# Altium PCB wheelchair.PcbDoc
Units mil, origin at the board's own origin, x right, y up, seen from the top; angles counter-clockwise.
Board outline 4200 x 3685 mil, 2 copper layers (Top Layer, Bottom Layer); 47 components, 63 nets, 283 pads, 4 vias.
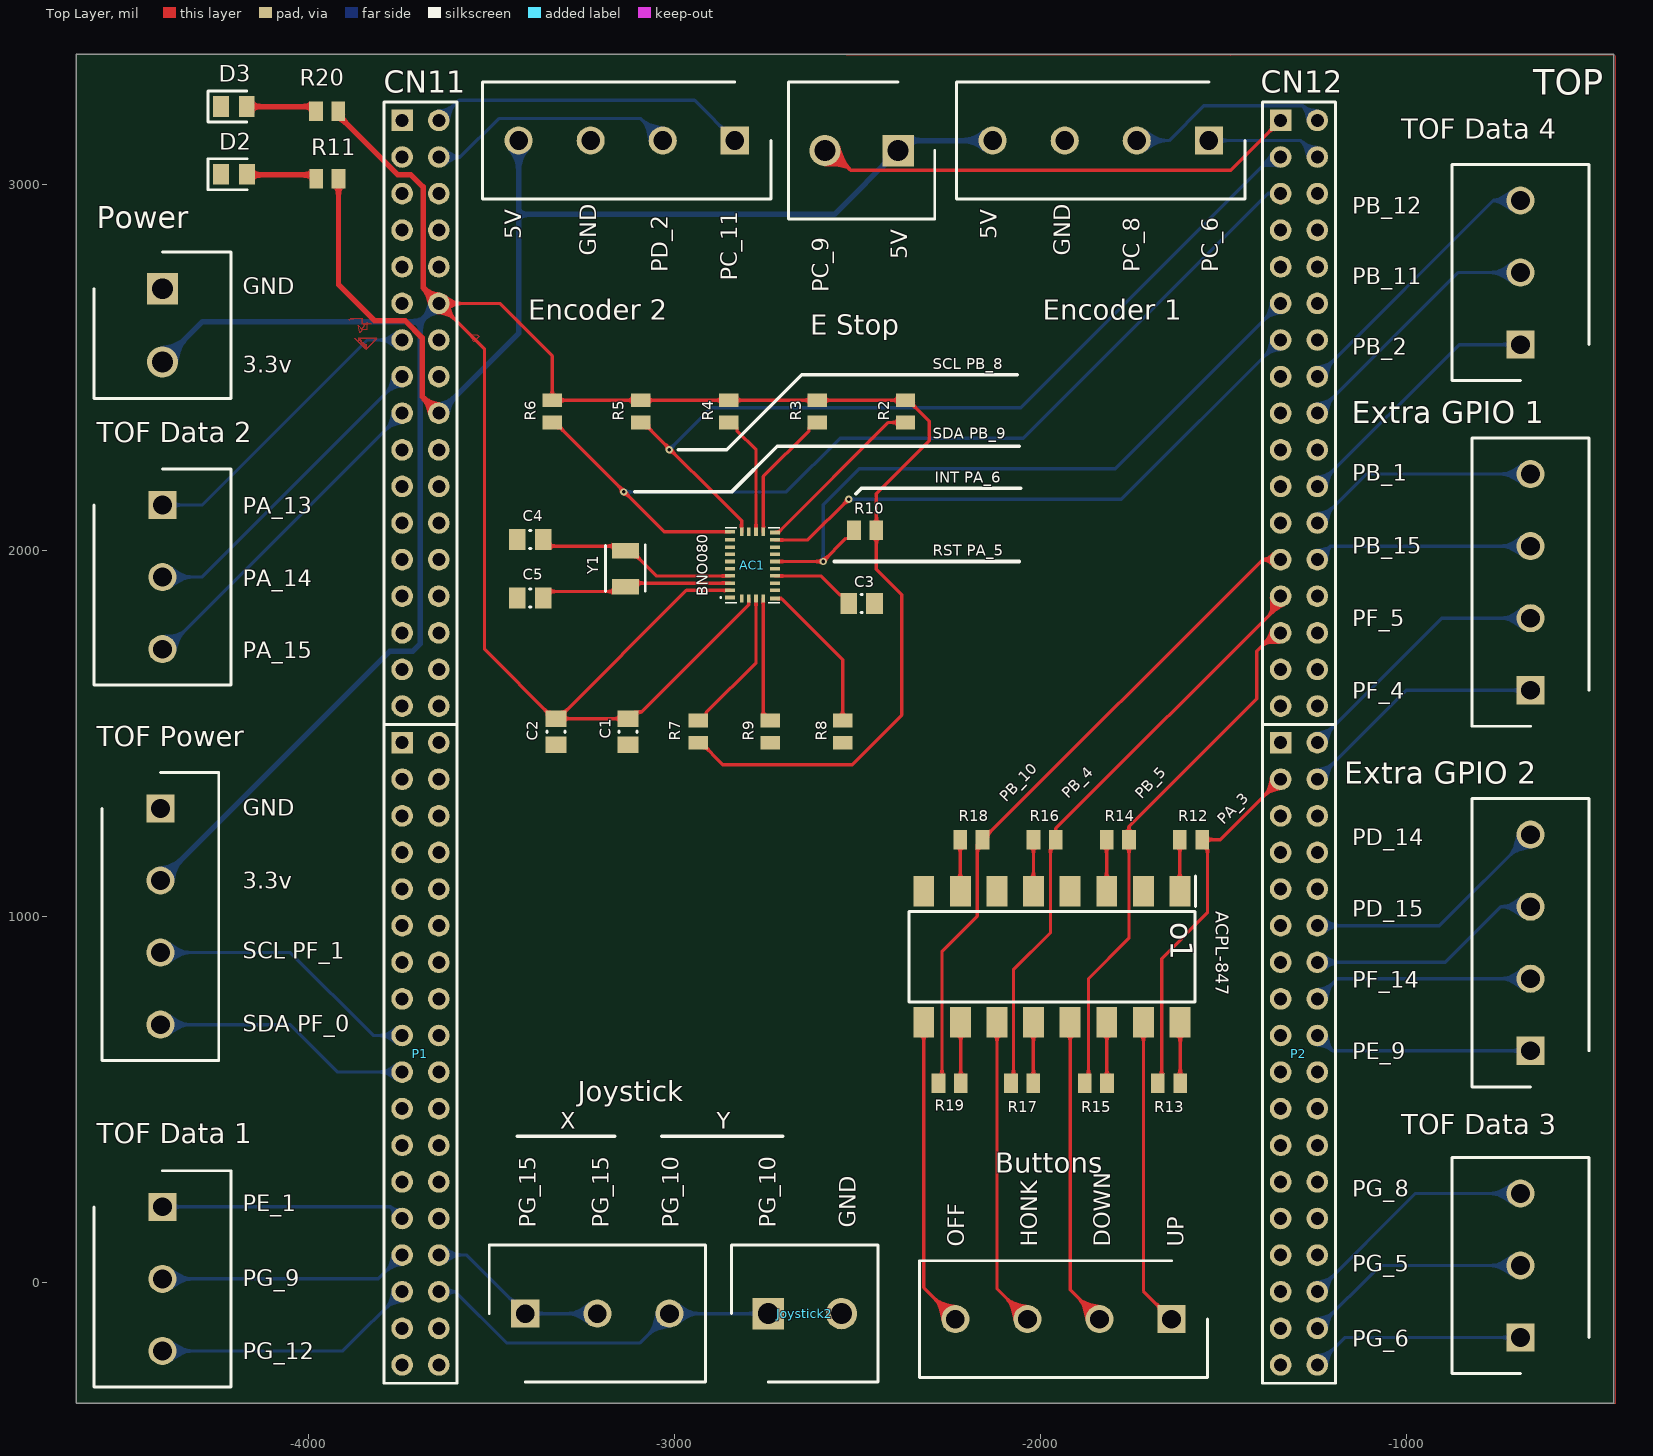
[diagram p0: Top Layer view]
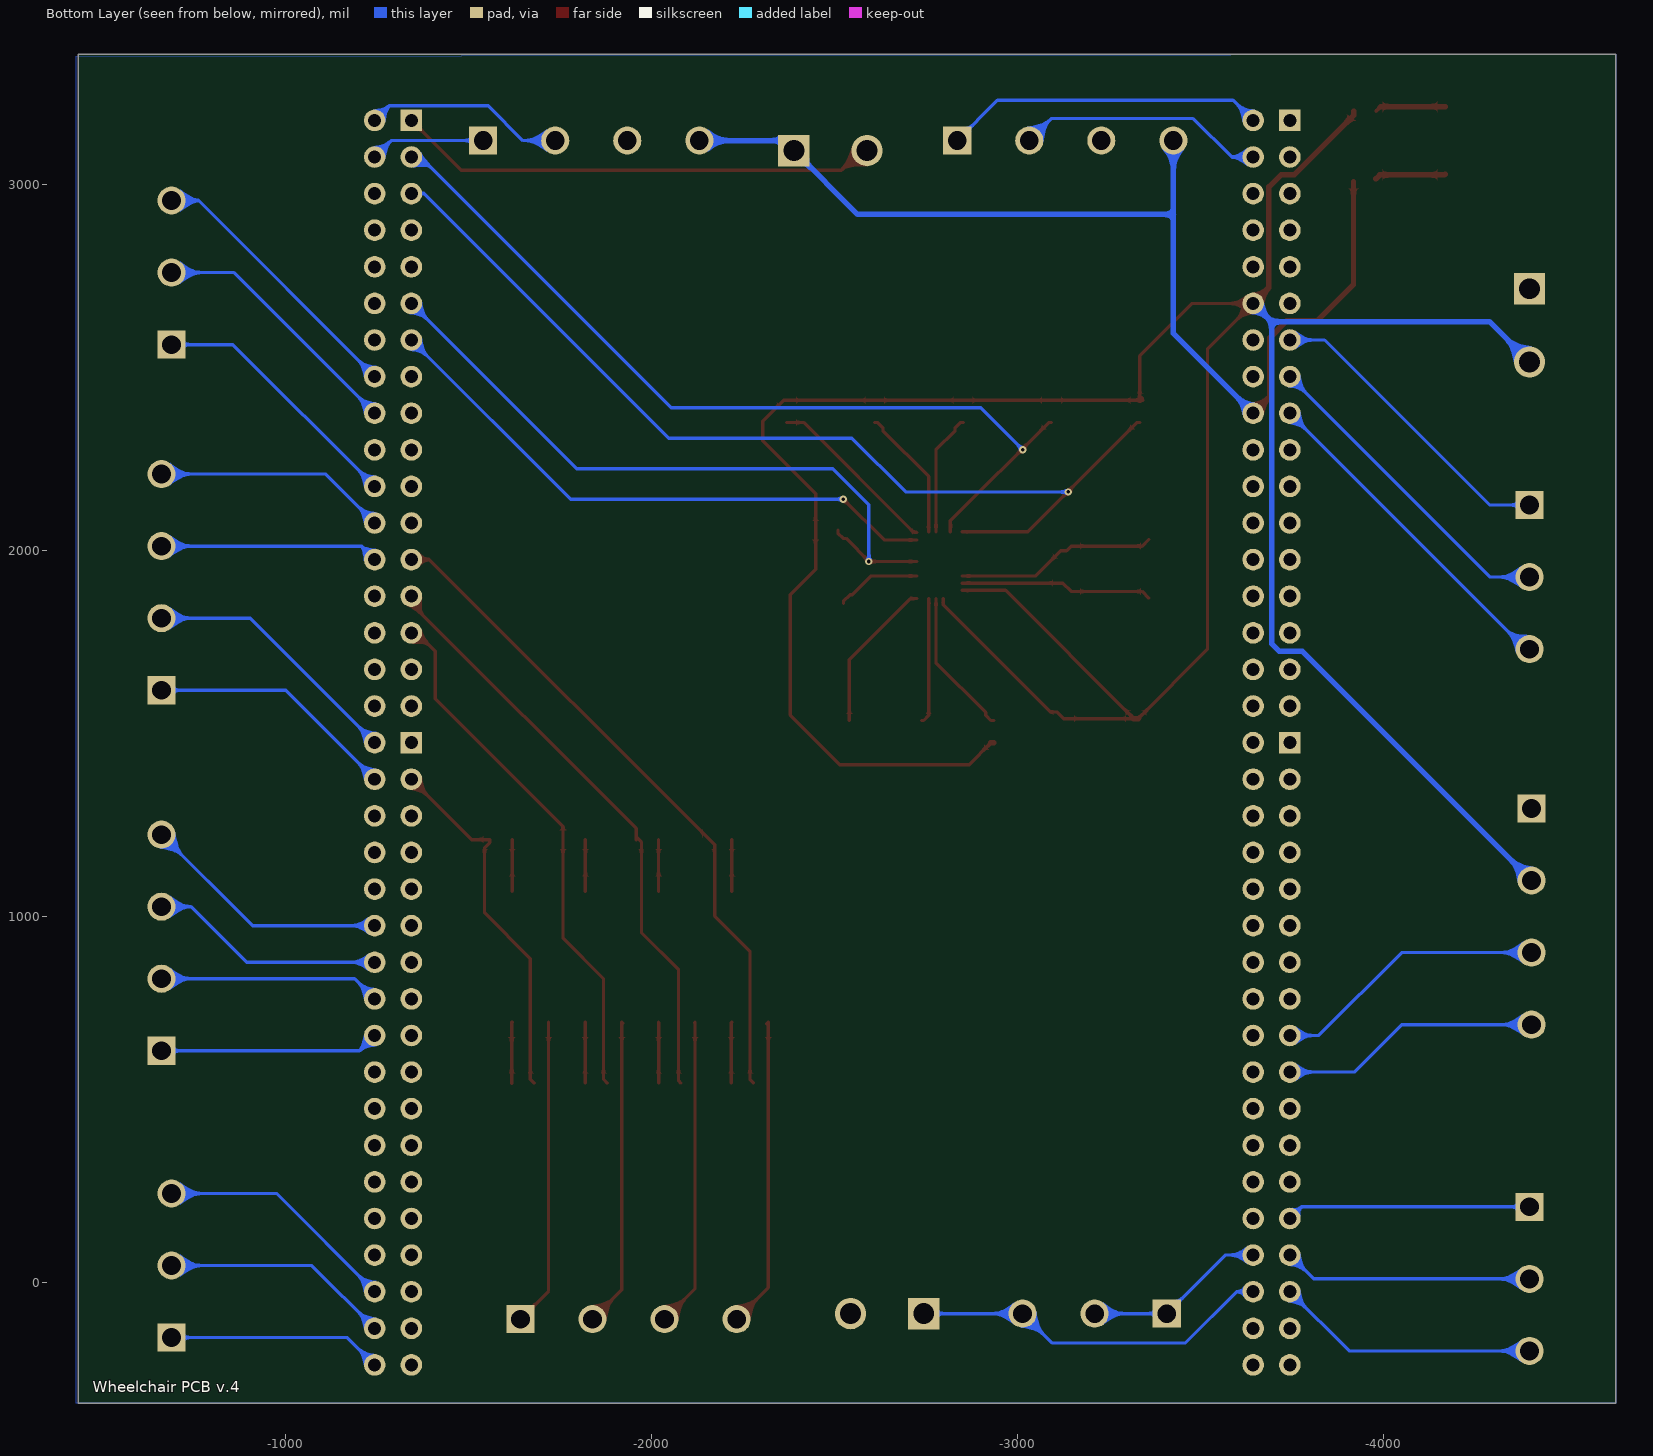
[diagram p1: Bottom Layer view, seen from below]

## Layer stack, top to bottom
Top Solder: solder mask 0.4, Solder Resist, Dk 3.5
Top Layer: signal copper 1.4
Dielectric 1: dielectric 12.6, FR-4, Dk 4.8
Bottom Layer: signal copper 1.4
Bottom Solder: solder mask 0.4, Solder Resist, Dk 3.5

## Board outline
-4635,-330 -4635,3355 -435,3355 -435,-330

## Design rules (kind name [scope] priority, off if disabled: settings)
Clearance [All] p1: gap=6 ignorepadtopadclearanceinfootprint=FALSE
ComponentClearance [All vs InComponent('No Component')] p1: gap=0 collisioncheckmode=3 verticalgap=100000 showdistances=FALSE
Height [InComponent('No Component')] p1: minheight=0 maxheight=1000 prefheight=500
PolygonConnect PolygonConnect_3 [All vs IsNamedPolygon('Top Layer-GND')] p1: connectstyle=Direct reliefconductorwidth=10 reliefentries=4 polygonreliefangle="90 Angle" airgapwidth=10
PolygonConnect PolygonConnect_2 [All vs IsNamedPolygon('Top Layer-GND')] p2: connectstyle=Direct reliefconductorwidth=10 reliefentries=4 polygonreliefangle="90 Angle" airgapwidth=10
PolygonConnect PolygonConnect_1 [All vs IsNamedPolygon('Bottom Layer-GND')] p3: connectstyle=Direct reliefconductorwidth=10 reliefentries=4 polygonreliefangle="90 Angle" airgapwidth=10
PolygonConnect [All] p4: connectstyle=Relief reliefconductorwidth=10 reliefentries=4 polygonreliefangle="90 Angle" airgapwidth=10
RoutingVias [All] p1: holewidth=10 width=20 viastyle="Through Hole" minholewidth=10 minwidth=20 maxholewidth=120 maxwidth=120
SolderMaskExpansion [All] p1: expansion=4
Width [All] p1: maxlimit=60 minlimit=6 preferedwidth=9
28 further rules are at their usual default settings.

## Components (designator, comment, footprint, x,y, rotation, side; value= is the part's Value field where it differs from the comment)
AC1 "BNO080" BNO080 -2795,1960 r180 top
Buttons "1729034" SHDR4W110P0X500_1X4_2000X810X1000P -1643.15,-100 r180 top
C1 "0.1uF" CAPC0805(2012)100_N -3127.67,1505 r90 top value=270pF
C2 "0.1uF" CAPC0805(2012)100_N -3325,1505 r90 top value=270pF
C3 "0.1uF" CAPC0805(2012)100_N -2490,1855 r180 top value=270pF
C4 "22pF" CAPC0805(2012)100_N -3395,2030 r180 top value=270pF
C5 "22pF" CAPC0805(2012)100_N -3395,1870 r180 top value=270pF
CN11 "Header 17X2" HDR2X17 -3745,3175 r270 top
CN12 "Header 17X2" HDR2X17 -1345,3175 r270 top
D2 "TS4148_RYG" DIOC2012X95N -4204.49,3027.8 r0 top
D3 "TS4148_RYG" DIOC2012X95N -4205,3212.8 r0 top
"E Stop" "1888687" SHDR2W90P0X508_1X2_1016X950X1500P -2390,3092.44 r180 top
"Encoder 1" "1729034" SHDR4W110P0X500_1X4_2000X810X1000P -1541.3,3120 r180 top
"Encoder 2" "1729034" SHDR4W110P0X500_1X4_2000X810X1000P -2836.3,3120 r180 top
"Extra GPIO 1" "1729034" SHDR4W110P0X500_1X4_2000X810X1000P -662.44,1618.15 r90 top
"Extra GPIO 2" "1729034" SHDR4W110P0X500_1X4_2000X810X1000P -662.44,633.15 r90 top
Joystick "1890976" SHDR3W110P0X500_1X3_1500X950X1500P -3408.7,-84.88 r0 top
Joystick2 "1888687" SHDR2W90P0X508_1X2_1016X950X1500P -2745,-84.88 r0 top
o1 "ACPL-847-300E" SOP254P1016X460-16N -1970,890 r270 top
P1 "Header 18X2" HDR2X18 -3745,1475 r270 top
P2 "Header 18X2" HDR2X18 -1345,1475 r270 top
Power "1888687" SHDR2W90P0X508_1X2_1016X950X1500P -4400,2715 r270 top
R2 "4.7k" RESC2013X70X40LL20T20 -2370,2380 r90 top
R3 "4.7k" RESC2013X70X40LL20T20 -2611.25,2380 r90 top
R4 "10k" RESC2013X70X40LL20T20 -2852.5,2380 r90 top
R5 "10k" RESC2013X70X40LL20T20 -3093.75,2380 r90 top
R6 "10k" RESC2013X70X40LL20T20 -3335,2380 r90 top
R7 "10k" RESC2013X70X40LL20T20 -2936.24,1505 r90 top
R8 "10k" RESC2013X70X40LL20T20 -2541.57,1505 r90 top
R9 "10k" RESC2013X70X40LL20T20 -2738.91,1505 r90 top
R10 "10k" RESC2013X70X40LL20T20 -2480,2055 r0 top
R11 "560" RESC2013X70X40LL20T20 -3949.49,3015 r0 top
R12 "1k" RESC2013X70X40LL20T20 -1590,1210 r180 top
R13 "1k" RESC2013X70X40LL20T20 -1650,545 r180 top
R14 "1k" RESC2013X70X40LL20T20 -1790,1210 r180 top
R15 "1k" RESC2013X70X40LL20T20 -1850,545 r180 top
R16 "1k" RESC2013X70X40LL20T20 -1990,1210 r180 top
R17 "1k" RESC2013X70X40LL20T20 -2051.15,545 r180 top
R18 "1k" RESC2013X70X40LL20T20 -2190,1210 r180 top
R19 "1k" RESC2013X70X40LL20T20 -2249.49,545 r180 top
R20 "560" RESC2013X70X40LL20T20 -3950,3200 r0 top
"TOF Data 1" "1890976" SHDR3W110P0X500_1X3_1500X950X1500P -4400,206.85 r270 top
"TOF Data 2" "1890976" SHDR3W110P0X500_1X3_1500X950X1500P -4400,2124.21 r270 top
"TOF Data 3" "1890976" SHDR3W110P0X500_1X3_1500X950X1500P -690,-150.38 r90 top
"TOF Data 4" "1890976" SHDR3W110P0X500_1X3_1500X950X1500P -690,2562.4 r90 top
"TOF Power" "1729034" SHDR4W110P0X500_1X4_2000X810X1000P -4405.48,1295.11 r270 top
Y1 "ABS07-32.768KHZ-7-T" Abracon_SMD2_0 -3135,1950 r90 top

## Footprints (in the part's own frame and the unit in brackets; to place one, negate y for a bottom-side part, rotate by r counter-clockwise, add the part's x,y. Pads: shape width x height; smd on the part's side, far side on the other; paste and mask are expansions set on the pad)
Abracon_SMD2_0 [mm]
  rect 1.1x1.9 smd paste+0 mask+0: 1(-1.25,0) 2(1.25,0)
  silkscreen extent -1.58,-1.37 1.67,1.38, body extent -1.9,-1.05 1.9,1.05, height 0.25
BNO080 [mm]
  rect 0.675x0.25 smd: 1(1.387,2.25) 6(-1.738,2.313) 7(-1.738,1.75) 8(-1.738,1.25) 9(-1.738,0.75) 10(-1.738,0.25) 11(-1.738,-0.25) 12(-1.738,-0.75) 13(-1.738,-1.25) 14(-1.738,-1.75) 15(-1.738,-2.263) 20(1.387,-2.313) 21(1.387,-1.75) 22(1.387,-1.25) 23(1.387,-0.75) 24(1.387,-0.25) 25(1.387,0.25) 26(1.387,0.75) 27(1.387,1.25) 28(1.387,1.75)
  rect 0.25x0.575 smd: 2(0.575,2.313) 3(0.075,2.313) 4(-0.425,2.313) 5(-0.925,2.313) 16(-0.925,-2.313) 17(-0.425,-2.313) 18(0.075,-2.313) 19(0.575,-2.313)
  silkscreen extent -2.07,-2.6 2.07,2.6, body extent -2.07,-2.6 1.73,2.6, height 1.28
CAPC0805(2012)100_N [mm] "Chip Capacitor, Body 2.0x1.2mm, Height 1.0mm, IPC Medium Density"
  rect 1.15x1.45 smd: 1(-0.9,0) 2(0.9,0)
  silkscreen extent -0.05,-0.62 0.05,0.63, body extent -1.1,-0.72 1.1,0.73, height 1
DIOC2012X95N [mm]
  rect 1.1x1.45 smd: 1(-0.9,0) 2(0.9,0)
  silkscreen extent -1.8,-1.08 0.9,1.07, body extent -1,-0.63 1,0.63, height 0.95
HDR2X17 [mm] "Connector; Header; 17x2 Position"
  rect 1.5x1.5 hole 0.9: 1(0,0)
  round 1.5 hole 0.9: 2(0,2.54) 3(2.54,0) 4(2.54,2.54) 5(5.08,0) 6(5.08,2.54) 7(7.62,0) 8(7.62,2.54) 9(10.16,0) 10(10.16,2.54) 11(12.7,0) 12(12.7,2.54) 13(15.24,0) 14(15.24,2.54) 15(17.78,0) 16(17.78,2.54) 17(20.32,0) 18(20.32,2.54) 19(22.86,0) 20(22.86,2.54) 21(25.4,0) 22(25.4,2.54) 23(27.94,0) 24(27.94,2.54) 25(30.48,0) 26(30.48,2.54) 27(33.02,0) 28(33.02,2.54) 29(35.56,0) 30(35.56,2.54) 31(38.1,0) 32(38.1,2.54) 33(40.64,0) 34(40.64,2.54)
  silkscreen extent -1.27,-1.27 41.91,3.81
HDR2X18 [mm] "Connector; Header; 18x2 Position"
  rect 1.5x1.5 hole 0.9: 1(0,0)
  round 1.5 hole 0.9: 2(0,2.54) 3(2.54,0) 4(2.54,2.54) 5(5.08,0) 6(5.08,2.54) 7(7.62,0) 8(7.62,2.54) 9(10.16,0) 10(10.16,2.54) 11(12.7,0) 12(12.7,2.54) 13(15.24,0) 14(15.24,2.54) 15(17.78,0) 16(17.78,2.54) 17(20.32,0) 18(20.32,2.54) 19(22.86,0) 20(22.86,2.54) 21(25.4,0) 22(25.4,2.54) 23(27.94,0) 24(27.94,2.54) 25(30.48,0) 26(30.48,2.54) 27(33.02,0) 28(33.02,2.54) 29(35.56,0) 30(35.56,2.54) 31(38.1,0) 32(38.1,2.54) 33(40.64,0) 34(40.64,2.54) 35(43.18,0) 36(43.18,2.54)
  silkscreen extent -1.27,-1.27 44.45,3.81
RESC2013X70X40LL20T20 [mm] "Chip Resistor, 2-Leads, Body 2.00x1.25mm, IPC High Density"
  rect 0.95x1.35 smd: 1(-0.775,0) 2(0.775,0)
  body extent -1.1,-0.72 1.1,0.72, height 0.7
SHDR2W90P0X508_1X2_1016X950X1500P [mm]
  rect 2.175x2.175 hole 1.45: 1(0,0)
  round 2.175 hole 1.45: 2(5.08,0)
  silkscreen extent -2.54,-4.75 7.62,4.75, body extent -3.11,-4.83 7.62,4.67, height 15
SHDR3W110P0X500_1X3_1500X950X1500P [mm]
  rect 1.95x1.95 hole 1.3: 1(0,0)
  round 1.95 hole 1.3: 2(5,0) 3(10,0)
  silkscreen extent -2.5,-4.75 12.5,4.75, body extent -3.06,-4.8 12.51,4.7, height 15
SHDR4W110P0X500_1X4_2000X810X1000P [mm]
  rect 1.95x1.95 hole 1.3: 1(0,0)
  round 1.95 hole 1.3: 2(5,0) 3(10,0) 4(15,0)
  silkscreen extent -2.5,-4.05 17.5,4.05, body extent -2.54,-4.02 18.03,4.13, height 10
SOP254P1016X460-16N [mm]
  rect 2.1x1.45 smd: 1(-4.55,8.89) 2(-4.55,6.35) 3(-4.55,3.81) 4(-4.55,1.27) 5(-4.55,-1.27) 6(-4.55,-3.81) 7(-4.55,-6.35) 8(-4.55,-8.89) 9(4.55,-8.89) 10(4.55,-6.35) 11(4.55,-3.81) 12(4.55,-1.27) 13(4.55,1.27) 14(4.55,3.81) 15(4.55,6.35) 16(4.55,8.89)
  silkscreen extent -5.6,-9.92 3.15,9.96, body extent -5.08,-9.92 5.08,9.92, height 4.6

## Part data
AC1: "Accelerometer", Manufacturer_Name="Hillcrest Laboratories", Datasheet Link=http://www.hillcrestlabs.com/download/5a05f340566d07c196001ec1, Height=1.18mm, Manufacturer_Part_Number=BNO080
Buttons "Encoder 1" "Encoder 2" "Extra GPIO 1" "Extra GPIO 2" "TOF Power": "Connector", Manufacturer_Name="Phoenix Contact", Mouser Part Number=651-1729034, RS Part Number=8020620, Allied_Number=70054377, Allied Price/Stock=https://www.alliedelec.com/phoenix-contact-1729034/70054377/, Datasheet Link=https://www.phoenixcontact.com/online/portal/gb/?uri=pxc-oc-itemdetail:pid=1729034&library=gben&pcck=P-11-01-05&tab=1&selectedCategory=ALL, Height=10mm, Manufacturer_Part_Number=1729034, Mouser Price/Stock=https://www.mouser.com/Search/Refine.aspx?Keyword=651-1729034, RS Price/Stock=http://uk.rs-online.com/web/p/products/8020620
C1 C2 C3 C4 C5: library part CMP-1036-02414-1, "CAP 270pF 100V ±1% 0805 (2012 Metric) Thickness 1mm SMD", Case-EIA=0805, Case-Metric=2012, Rated Voltage="100 V", Tolerance=±1%, Max Thickness="1 mm", Technology=SMT
CN11 CN12: "Header, 17-Pin, Dual row", LatestRevisionDate=17-Jul-2002, LatestRevisionNote="Re-released for DXP Platform.", Publisher="Altium Limited"
D2 D3: "Diode", Manufacturer_Name="Taiwan Semiconductor", Manufacturer_Part_Number="TS4148 RYG", Mouser Part Number=821-TS4148RYG, Allied_Number=70439260, Allied Price/Stock=https://www.alliedelec.com/taiwan-semiconductor-ts4148-ryg/70439260/, Datasheet Link="https://componentsearchengine.com/Datasheets/2/TS4148 RYG.pdf", Height=0.95mm, Mouser Price/Stock=https://www.mouser.com/Search/Refine.aspx?Keyword=821-TS4148RYG
"E Stop" Joystick2 Power: "Connector", Manufacturer_Name="Phoenix Contact", Mouser Part Number=651-1888687, RS Part Number=8045095, Allied_Number=70054422, Allied Price/Stock=https://www.alliedelec.com/phoenixcontact-1888687/70054422/, Datasheet Link=https://componentsearchengine.com/Datasheets/1/1888687.pdf, Height=15mm, Manufacturer_Part_Number=1888687, Mouser Price/Stock=https://www.mouser.com/Search/Refine.aspx?Keyword=651-1888687, RS Price/Stock=http://uk.rs-online.com/web/p/products/8045095
Joystick "TOF Data 1" "TOF Data 2" "TOF Data 3" "TOF Data 4": "Connector", Manufacturer_Name="Phoenix Contact", Mouser Part Number=651-1890976, RS Part Number=8045111, Allied_Number=70054392, Allied Price/Stock=https://www.alliedelec.com/phoenix-contact-1890976/70054392/, Datasheet Link=https://www.phoenixcontact.com/online/portal/gb/pxc/product_detail_page/!ut/p/z1/5Vdbc6IwFP4rvvi2MSGA4KOXqtXW6a7WCi9MAsFJy02kUvvrN0GdVXeK3XHcF5gzQy7nO8l3ksPwQRsuoB2RDV-SjMcRCUTfspsOHihIGWrKI5pjHbXno1Hnbjwc9n8hOIc2tNcsYG7GvC7J2DJOt9BqPzzIiYxQaCmylbjuG7SegK, Height=15mm, Manufacturer_Part_Number=1890976, Mouser Price/Stock=https://www.mouser.com/Search/Refine.aspx?Keyword=651-1890976, RS Price/Stock=http://uk.rs-online.com/web/p/products/8045111
o1: "Diode", Manufacturer_Name="Avago Technologies", Mouser Part Number=630-ACPL-847-300E, RS Part Number=6935959P, Datasheet Link=https://docs.broadcom.com/docs/AV02-1429EN, Height=4.6mm, Manufacturer_Part_Number=ACPL-847-300E, Mouser Price/Stock=https://www.mouser.com/Search/Refine.aspx?Keyword=630-ACPL-847-300E, RS Price/Stock=http://uk.rs-online.com/web/p/products/6935959P
P1 P2: "Header, 18-Pin, Dual row", LatestRevisionDate=17-Jul-2002, LatestRevisionNote="Re-released for DXP Platform.", Publisher="Altium Limited"
R2 R3 R4 R5 R6 R7 R8 R9 R10 R11 R12 R13 R14 R15 R16 R17 R18 R19 R20: library part CMP-2001-04440-2, "RES SMD 150K OHM 1% 1/8W 0805", Manufacturer=Panasonic, Part Number=ERJ-6ENF1503V, Datasheet=http://industrial.panasonic.com/cdbs/www-data/pdf/RDA0000/AOA0000C86.pdf

## Via types
v1: diameter 20, hole 10, Top Layer to Bottom Layer, 4 vias

## Nets (pads, with @x,y where several pads share a name; then routed paths per layer and width w, separated by ;. In a path a pad name is that pad's centre, name@x,y a point inside that pad or via, vN(x,y) a via of type N, cw(c..) or ccw(c..) an arc to the next point about the centre after c; other vN are vias at no path point)
3.3V: "TOF Power.2" AC1.3 AC1.28 C1.2 C2.2 CN11.12 Power.2 R2.2 R3.2 R4.2 R5.2 R6.2 R7.1 R10.2 R20.2 | length 8982.9
  Top Layer w9: R6.2@-3342.87,2410.51 -2362.13,2410.51 -2305,2353.39 -2305,2300 -2449.49,2155.51 -2449.49,1948.31 -2380,1878.82 -2380,1550.43 -2515.43,1415 -2868.88,1415 R7.1@-2928.37,1474.49 ; R6.2 -3335,2531.44 -3478.56,2675 CN11.12 -3520,2550 -3520,1729.53 C2.2@-3330.91,1540.43 ; AC1.28 -2968.43,1891.1 -3319.09,1540.43 C1.2 -3109.53,1558.57 -3091.43,1558.57 -2797.95,1852.05 AC1.3
  Top Layer w15: R20.2 -3919.49,3188.64 -3757.05,3026.2 -3721.2,3026.2 -3688.03,2993.03 -3688.03,2718.03 CN11.12 ; R6.2@-3338.56,2414.07 R6.2 ; C2.2@-3330.91,1540.43 C2.2@-3319.09,1540.43 ; R7.1 R7.1@-2928.37,1474.49
  Bottom Layer w15: -4405.47,1098.26 -3778.73,1725 -3715.51,1725 -3695,1745.51 -3695,2625 ; Power.2 -4290,2625 -3695,2625 ; CN11.12 -3695,2625
5V: "E Stop.1" "Encoder 1.4" "Encoder 2.4" CN11.18 R11.2 | length 3008.8
  Top Layer w15: R11.2@-3918.98,3007.13 -3918.98,2726.48 -3819.73,2627.23 -3736.38,2627.23 -3690.3,2581.15 -3690.3,2420.3 CN11.18
  Bottom Layer w15: CN11.18@-3645,2375.39 CN11.18 -3426.85,2593.15 -3426.85,2918.15 ; -3426.85,3120 -3426.85,2918.15 ; -2131.85,3120 -2362.44,3120 -2390,3092.44 -2564.29,2918.15 -3426.85,2918.15
Down: Buttons.2 o1.13 | length 847.3
  Top Layer w9: o1.13@-1922.31,708.56 o1.13 -1920,-20 Buttons.2
"Encoader 1a PC_8": "Encoder 1.2" CN12.2 | length 549.1
  Bottom Layer w9: -1738.15,3120 -1650,3120 -1554.97,3215.03 -1285.03,3215.03 CN12.2
"Encoader 1b PC_6": "Encoder 1.1" CN12.4 | length 328.5
  Top Layer w9: CN12.4@-1245,3061.46 CN12.4
  Bottom Layer w9: -1541.3,3120 -1290,3120 CN12.4
"Encoader 2a PD_2": "Encoder 2.2" CN11.4 | length 680.2
  Bottom Layer w9: CN11.4 -3585.73,3075 -3480.73,3180 -3093.15,3180 -3033.15,3120
"Encoader 2b PC_11": "Encoder 2.1" CN11.2 | length 877
  Bottom Layer w9: CN11.2 -3590,3230 -2946.3,3230 -2836.3,3120
GND: "Encoder 1.3" "Encoder 2.3" "TOF Power.1" AC1.2 AC1.10 AC1.25 C1.1 C2.1 C3.1 C4.2 C5.2 CN11.8 CN11.19 CN11.20 CN11.22 CN12.9 CN12.20 D2.1 D3.1 Joystick2.2 o1.2 o1.4 o1.6 o1.8 P1.15 P1.26 P2.5 P2.20 P2.29 Power.1 R8.1 R9.1
Honk: Buttons.3 o1.11 | length 846.5
  Top Layer w9: o1.11@-2119.16,710.03 o1.11 -2120,-16.85 Buttons.3
"INT PA_6": AC1.14 CN12.13 | length 1607.8
  Top Layer w9: AC1.14 -2636.61,2028.9 -2525.51,2140 v1(-2525,2140)
  Bottom Layer w9: v1(-2525,2140) -1780,2140 CN12.13
NetAC1_4: AC1.4 R7.2 | length 403.5
  Top Layer w9: R7.2 -2928.37,1535.51 -2914.17,1549.71 -2914.17,1557.59 -2778.27,1693.48 AC1.4
NetAC1_5: AC1.5 R9.2 | length 344.8
  Top Layer w9: AC1.5 -2758.58,1549.71 -2744.38,1535.51 R9.2
NetAC1_6: AC1.6 R8.2 | length 420.4
  Top Layer w9: AC1.6 -2718.21,1868.94 -2717.79,1868.52 -2708.52,1868.52 -2541.57,1701.57 R8.2
NetAC1_9: AC1.9 C3.2 | length 235.9
  Top Layer w9: AC1.9 -2600.91,1930.47 -2549.48,1879.04 -2543.57,1879.04 -2525.43,1860.91 C3.2
NetAC1_15: AC1.15 R2.1 | length 481
  Top Layer w9: AC1.15 -2718.21,2049.09 -2417.82,2349.49 R2.1
NetAC1_16: AC1.16 R3.1 | length 364.1
  Top Layer w9: AC1.16 -2758.58,2202.16 -2633.32,2327.41 -2633.32,2335.29 -2619.12,2349.49 R3.1
NetAC1_17: AC1.17 R4.1 | length 333.8
  Top Layer w9: R4.1 -2844.63,2349.49 -2830.43,2335.29 -2830.43,2327.41 -2778.27,2275.26 AC1.17
NetAC1_26: AC1.26 C4.1 Y1.2 | length 551.2
  Top Layer w9: C4.1 -3341.43,2011.86 -3147.65,2011.86 Y1.2 -3119.25,1999.21 -3050.51,1930.47 AC1.26
NetAC1_27: AC1.27 C5.1 Y1.1 | length 526.9
  Top Layer w9: C5.1 -3341.43,1888.14 -3147.65,1888.14 -3125,1910.79 AC1.27
NetD2_2: D2.2 R11.1 | length 194.4
  Top Layer w15: D2.2 -4167.46,3026.2 -3991.2,3026.2 R11.1
NetD3_2: D3.2 R20.1 | length 194.4
  Top Layer w9: R20.1@-3993.31,3212.8 R20.1
  Top Layer w15: D3.2 R20.1@-3993.31,3212.8
Neto1_1: o1.1 R12.2 | length 141.1
  Top Layer w9: R12.2 -1620.51,1069.65 o1.1
Neto1_3: o1.3 R14.2 | length 141.1
  Top Layer w9: R14.2 -1820.51,1069.65 o1.3
Neto1_5: o1.5 R16.2 | length 141.1
  Top Layer w9: R16.2 -2020.51,1069.64 o1.5
Neto1_7: o1.7 R18.2 | length 141.1
  Top Layer w9: R18.2 -2220.51,1069.65 o1.7
Neto1_10: o1.10 R19.1 | length 166.3
  Top Layer w9: o1.10 -2218.98,709.84 R19.1
Neto1_12: o1.12 R17.1 | length 166.1
  Top Layer w9: R17.1 -2020.64,710.22 o1.12
Neto1_14: o1.14 R15.1 | length 166.1
  Top Layer w9: o1.14 -1820,545.51 R15.1
Neto1_16: o1.16 R13.1 | length 166.1
  Top Layer w10: o1.16 -1619.49,710.35 R13.1
Off: Buttons.4 o1.9 | length 852.3
  Top Layer w9: o1.9@-2316.01,706.88 o1.9 -2320,-13.7 Buttons.4
PA_3: P2.3 R12.1 R13.2 | length 1010
  Top Layer w9: R13.2 -1670,555.51 -1670,885 -1545,1010 -1545,1187.64 -1559.49,1202.13 R12.1 -1510,1210 P2.3
PB_1: "Extra GPIO 1.4" CN12.24 | length 637.9
  Bottom Layer w9: CN12.24 -1111.3,2208.7 -662.44,2208.7
PB_4: CN12.27 R16.1 R17.2 | length 1643
  Top Layer w9: R17.2 -2075,551.67 -2075,855 -1973.69,956.31 -1973.69,1203.67 R16.1@-1959.49,1217.87 ; R16.1 R16.1@-1959.49,1217.87 ; CN12.27 -1345,1855 -1959.49,1240.51 R16.1@-1959.49,1217.87
PB_5: CN12.29 R14.1 R15.2 | length 1460.6
  Top Layer w9: R15.2 -1870,555.51 -1870,830 -1759.49,940.51 -1759.49,1245.51 -1410,1595 -1410,1725 -1360,1775 CN12.29
PB_10: CN12.25 R18.1 R19.2 | length 1846.3
  Top Layer w9: R19.2 -2270,555 -2270,905 -2173.69,1001.31 -2173.69,1195.8 -1394.49,1975 CN12.25
PB_15: "Extra GPIO 1.3" CN12.26 | length 597.8
  Bottom Layer w9: CN12.26 -1208.15,2011.85 -662.44,2011.85
PC_9: "E Stop.2" CN12.1 | length 1358.8
  Top Layer w9: -2590,3092.44 -2572.44,3092.44 -2519.13,3039.13 -1480.87,3039.13 CN12.1
  Bottom Layer w9: CN12.1@-1370.03,3149.97 CN12.1
PD_14: "Extra GPIO 2.4" P2.12 | length 685.6
  Bottom Layer w9: P2.12 -911.14,975 -662.44,1223.7
PD_15: "Extra GPIO 2.3" P2.14 | length 645.5
  Bottom Layer w9: P2.14 -895,875 -743.15,1026.85 -662.44,1026.85
PE_9: "Extra GPIO 2.1" P2.18 | length 599.9
  Bottom Layer w9: P2.18 -1203.15,633.15 -662.44,633.15
PF_4: "Extra GPIO 1.1" P2.4 | length 683.3
  Bottom Layer w9: P2.4 -1001.85,1618.15 -662.44,1618.15
PF_5: "Extra GPIO 1.2" P2.2 | length 723.4
  Bottom Layer w9: P2.2 -905,1815 -662.44,1815
PF_14: "Extra GPIO 2.2" P2.16 | length 625.3
  Top Layer w9: P2.16 P2.16@-1225,775
  Bottom Layer w9: P2.16 -1190,830 -662.44,830
"RST PA_5": AC1.11 CN12.11 R10.1 | length 1888.8
  Top Layer w9: AC1.11 -2595.67,1969.84 -2532.59,2032.93 -2524.71,2032.93 -2510.51,2047.13 R10.1
  Bottom Layer w9: v1(-2595,1970) -2595,2125 -2496.67,2223.33 -1796.67,2223.33 CN12.11
"SCL PB_8": AC1.19 CN12.3 R5.1 | length 2418.7
  Top Layer w9: R5.1 -3085.88,2349.49 -2817.64,2081.25 AC1.19
  Bottom Layer w9: v1(-3015,2275.26) -2900.26,2390 -2055,2390 -1370,3075 CN12.3
"SCL PF_1": "TOF Power.3" P1.17 | length 754.3
  Bottom Layer w9: -4405.47,901.41 -4050.47,901.41 -3824.06,675 P1.17
"SDA PB_9": AC1.20 CN12.5 R6.1 | length 2766.6
  Top Layer w9: R6.1 -3327.13,2349.49 -3028.7,2051.06 AC1.20 ; CN12.5@-1345,2950 CN12.5
  Bottom Layer w9: v1(-3140,2160) -2695.26,2160 -2548.59,2306.67 -2048.33,2306.67 -1380,2975 CN12.5
"SDA PF_0": "TOF Power.4" P1.19 | length 714.1
  Bottom Layer w9: -4405.47,704.56 -4050.47,704.56 -3920.91,575 P1.19
"TOF 1a PG_12": "TOF Data 1.3" P1.31 | length 722
  Bottom Layer w9: -4400,-186.85 -3906.85,-186.85 P1.31
"TOF 1b PG_9": "TOF Data 1.2" P1.29 | length 681.9
  Bottom Layer w9: -4400,10 -3810,10 P1.29
"TOF 1c PE_1": "TOF Data 1.1" P1.27 | length 668.2
  Bottom Layer w9: -4400,206.85 -3776.85,206.85 P1.27
"TOF 2a PA_15": "TOF Data 2.3" CN11.17 | length 942
  Bottom Layer w9: -4420,1730.51 -4389.49,1730.51 CN11.17
"TOF 2b PA_14": "TOF Data 2.2" CN11.15 | length 887.1
  Top Layer w9: -4400,1927.36 -4400,1930 -4397.36,1930
  Bottom Layer w9: -4400,1927.36 -4292.64,1927.36 CN11.15
"TOF 2c PA_13": "TOF Data 2.1" CN11.13 | length 861.7
  Bottom Layer w9: -4420,2124.21 -4400,2124.21 -4290.79,2124.21 -3840,2575 CN11.13
"TOF 3a PG_8": "TOF Data 3.3" P2.32 | length 666.1
  Bottom Layer w9: P2.32 -976.68,243.32 -690,243.32
"TOF 3b PG_5": "TOF Data 3.2" P2.34 | length 626
  Bottom Layer w9: P2.34 -1073.53,46.47 -690,46.47
"TOF 3c PG_6": "TOF Data 3.1" P2.36 | length 585.9
  Bottom Layer w9: P2.36 -1170.38,-150.38 -690,-150.38
"TOF 4a PB_12": "TOF Data 4.3" CN12.16 | length 754.3
  Bottom Layer w9: CN12.16 -763.9,2956.1 -690,2956.1
"TOF 4b PB_11": "TOF Data 4.2" CN12.18 | length 714.2
  Bottom Layer w9: CN12.18 -860.75,2759.25 -690,2759.25
"TOF 4c PB_2": "TOF Data 4.1" CN12.22 | length 715.5
  Bottom Layer w9: CN12.22 -857.6,2562.4 -690,2562.4
Up: Buttons.1 o1.15 | length 842.7
  Top Layer w9: o1.15 -1720,-23.15 Buttons.1
"X PG_15": Joystick.1 Joystick.2 P1.30 | length 499.4
  Bottom Layer w9: P1.30 -3568.58,75 Joystick.1 Joystick.2
"Y PG_10": Joystick2.1 Joystick.3 P1.32 | length 991.2
  Bottom Layer w9: P1.32 -3600,-25 -3460,-165 -3095.12,-165 Joystick.3 Joystick2.1
pads on no net: AC1.1 AC1.7 AC1.8 AC1.12 AC1.13 AC1.18 AC1.21 AC1.22 AC1.23 AC1.24 CN11.1 CN11.3 CN11.5 CN11.6 CN11.7 CN11.9 CN11.10 CN11.11 CN11.14 CN11.16 CN11.21 CN11.23 CN11.24 CN11.25 CN11.26 CN11.27 CN11.28 CN11.29 CN11.30 CN11.31 CN11.32 CN11.33 CN11.34 CN12.6 CN12.7 CN12.8 CN12.10 CN12.12 CN12.14 CN12.15 CN12.17 CN12.19 CN12.21 CN12.23 CN12.28 CN12.30 CN12.31 CN12.32 CN12.33 CN12.34 P1.1 P1.2 P1.3 P1.4 P1.5 P1.6 P1.7 P1.8 P1.9 P1.10 P1.11 P1.12 P1.13 P1.14 P1.16 P1.18 P1.20 P1.21 P1.22 P1.23 P1.24 P1.25 P1.28 P1.33 P1.34 P1.35 P1.36 P2.1 P2.6 P2.7 P2.8 P2.9 P2.10 P2.11 P2.13 P2.15 P2.17 P2.19 P2.21 P2.22 P2.23 P2.24 P2.25 P2.26 P2.27 P2.28 P2.30 P2.31 P2.33 P2.35
copper on no net: | length 29
  Top Layer w9: -1348.76,1078.76 -1345,1075 ; -1345,875 -1345,888.69 ; -1345,975 -1345,985

## Polygon pours and split planes (outlines as drawn)
3.3V on Top Layer "Top Layer-3.3V 3" (hatched Horizontal grid 20 track 8, shelved, pour order 18): -3890,2630 -3885,2635 -3854.39,2635 -3854.39,2619.47 -3854.39,2635
GND on Top Layer "Top Layer-GND" (solid, shelved, pour order 2): -4635,3355.24 -4635,-330 -430,-330 -430,3349.87
no net on Top Layer "Top Layer-No Net 1" (solid, shelved, pour order 10): -3560,2590 -3540,2590 -3535,2585 -3550,2570
3.3V on Top Layer "Top Layer-3.3V" (hatched Horizontal grid 20 track 8, shelved, pour order 16): -3865,2580 -3865,2571.23 -3843.77,2550 -3815,2578.77 -3815,2580
3.3V on Top Layer "Top Layer-3.3V 1" (hatched Horizontal grid 20 track 8, shelved, pour order 14): -3860,2580 -3815,2580 -3843.77,2551.23 -3843.77,2563.77 -3843.77,2551.23
3.3V on Top Layer "Top Layer-3.3V 2" (solid, shelved, pour order 12): -3865,2580 -3843.77,2558.77 -3843.77,2551.23
no net on Top Layer "Top Layer-No Net" (solid, shelved, pour order 4): -3875,2580 -3846.23,2551.23 -3843.77,2551.23
no net on Top Layer "Top Layer-No Net 2" (solid, shelved, pour order 8): -3855,2618.86 -3830,2618.86 -3830,2620
no net on Top Layer "Top Layer-No Net 3" (solid, shelved, pour order 6): -3865,2615 -3855,2605 -3840,2605 -3840,2622.71 -3847.71,2615 -3850,2615 -3850,2610.61 -3855,2605.61 -3855,2600.61 -3860.61,2595
GND on Bottom Layer "Bottom Layer-GND" (solid, shelved, pour order 0): -4635,-330 -430,-330 -430,3349.87 -4635,3355.24

## Silkscreen, mask and mechanical layers (free items; w line width, h text height)
Top Overlay:
  lines w10: -3430,400 -3165,400 ; -3110,2160 -2845,2160 -2720,2285 -2095,2285 -2060,2285 ; -3035,400 -2705,400 ; -2990,2275 -2935,2275 -2858.31,2275 -2653.31,2480 -2065,2480 ; -2565,1970 -2060,1970 ; -2505,2155 -2490,2170 -2425,2170 -2055,2170
  text "TOP" at -655,3245 h70
  text "PB_12" at -1150,2920 h45
  text "5V" at -3420,2849.97 h45 r90
  text "5V" at -2120,2849.97 h45 r90
  text "GND" at -3215,2804.99 h45 r90
  text "GND" at -1920,2804.99 h45 r90
  text "5V" at -2365,2794.97 h45 r90
  text "PD_2" at -3020,2760 h45 r90
  text "PC_8" at -1730,2760 h45 r90
  text "PC_6" at -1515,2760 h45 r90
  text "PC_11" at -2830,2737.51 h45 r90
  text "PB_11" at -1150,2727.5 h45
  text "PC_9" at -2580,2705 h45 r90
  text "GND" at -4180,2700 h45
  text "PB_2" at -1150,2535 h45
  text "SCL PB_8" at -2295,2495 h30
  text "3.3v" at -4180,2485 h45
  text "SDA PB_9" at -2295,2305 h30
  text "PB_1" at -1150,2190 h45
  text "INT PA_6" at -2290,2185 h30
  text "PA_13" at -4180,2100 h45
  text "PB_15" at -1150,1991.67 h45
  text "RST PA_5" at -2295,1985 h30
  text "PA_14" at -4180,1902.5 h45
  text "BNO080" at -2910,1875 h30 r90
  text "PF_5" at -1150,1793.33 h45
  text "PA_15" at -4180,1705 h45
  text "PF_4" at -1150,1595 h45
  text "PB_4" at -1925,1320 h30 r45
  text "PB_5" at -1725,1319.25 h30 r46.47
  text "PB_10" at -2095,1310.38 h30 r46.17
  text "GND" at -4180,1275 h45
  text "PA_3" at -1500,1250 h30 r45
  text "PD_14" at -1150,1195 h45
  text "3.3v" at -4180,1075.83 h45
  text "ACPL-847" at -1535,1015 h60 r270
  text "PD_15" at -1150,1000 h45
  text "SCL PF_1" at -4180,884.17 h45
  text "PF_14" at -1150,805 h45
  text "SDA PF_0" at -4180,685 h45
  text "PE_9" at -1150,610 h45
  text "X" at -3312.5,420 h45
  text "Y" at -2885,420 h45
  text "PG_8" at -1150,235 h45
  text "PE_1" at -4180,195 h45
  text "PG_15" at -3380,150 h45 r90
  text "PG_15" at -3180,150 h45 r90
  text "PG_10" at -2990,150 h45 r90
  text "PG_10" at -2725,150 h45 r90
  text "GND" at -2505.51,150 h45 r90
  text "OFF" at -2210,97.49 h45 r90
  text "HONK" at -2010,97.49 h45 r90
  text "DOWN" at -1810,97.49 h45 r90
  text "UP" at -1610,97.49 h45 r90
  text "PG_5" at -1150,30 h45
  text "PG_9" at -4180,-10 h45
  text "PG_6" at -1150,-175 h45
  text "PG_12" at -4180,-209.25 h45
Bottom Overlay:
  text "Wheelchair PCB v.4" at -475,-300 h30
Mechanical 7:
  the board outline again, w10